# Altium PCB EEM_PWR_MOD_AC.pcbdoc (part 1 of 2)
Units mm, origin at the board's own origin, x right, y up, seen from the top; angles counter-clockwise.
Board outline 177.11 x 100.13 mm, 2 copper layers (Top Layer, Bottom Layer), stack 1.62 mm thick; 73 components, 37 nets, 173 pads, 46 vias.
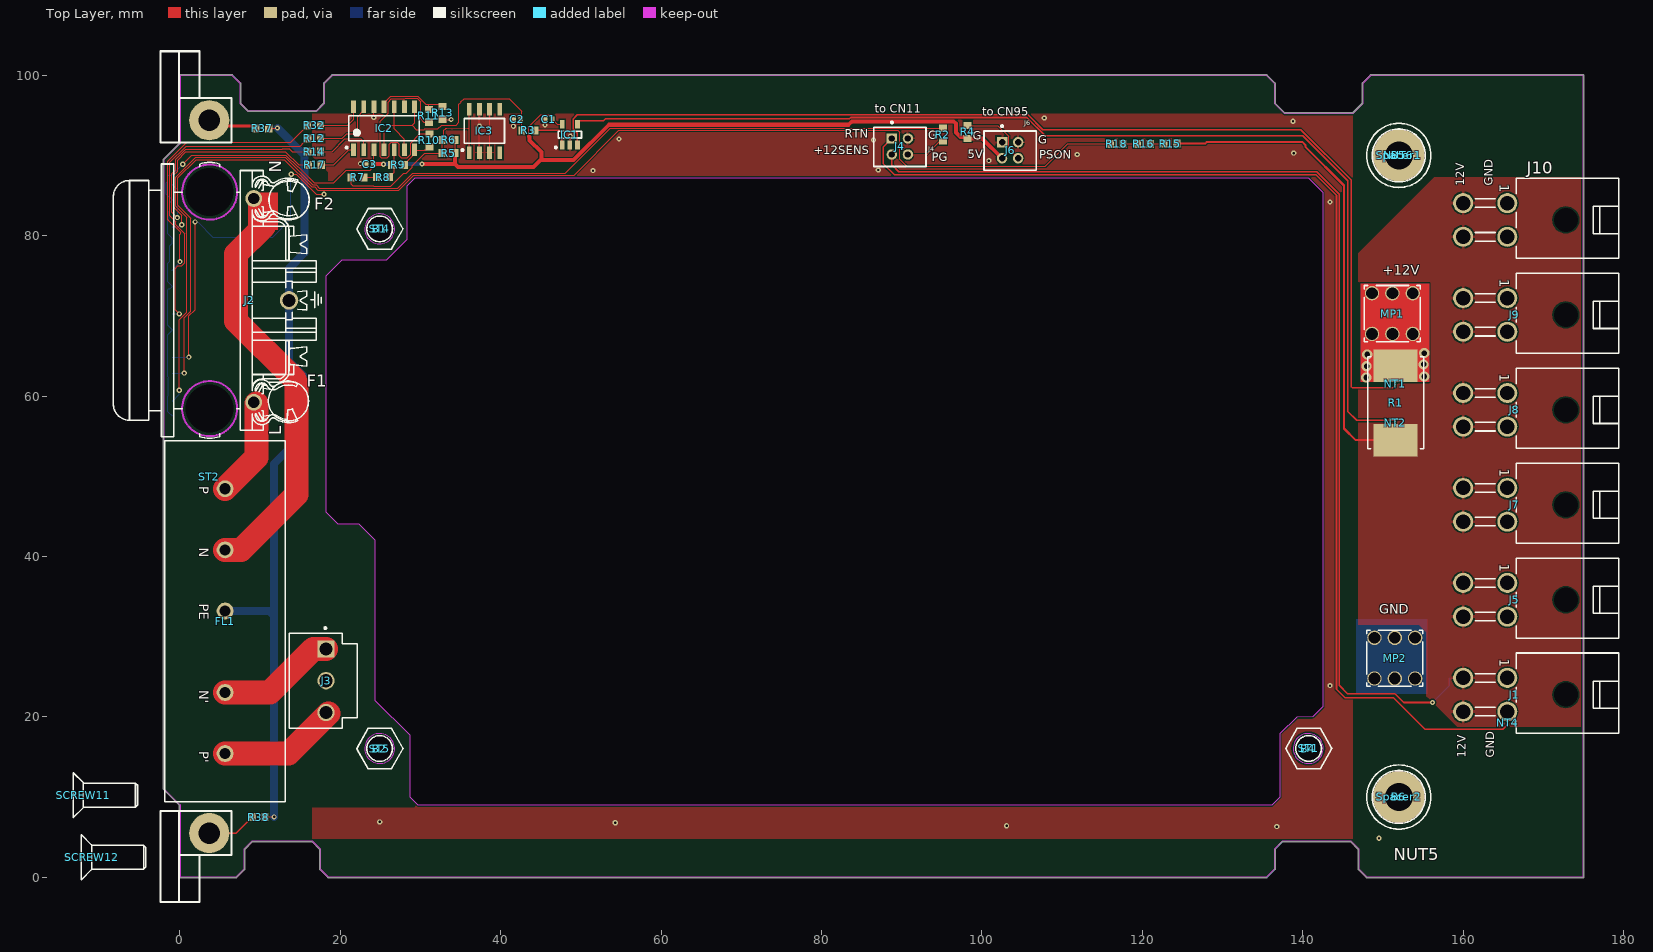
[diagram p0: Top Layer view]
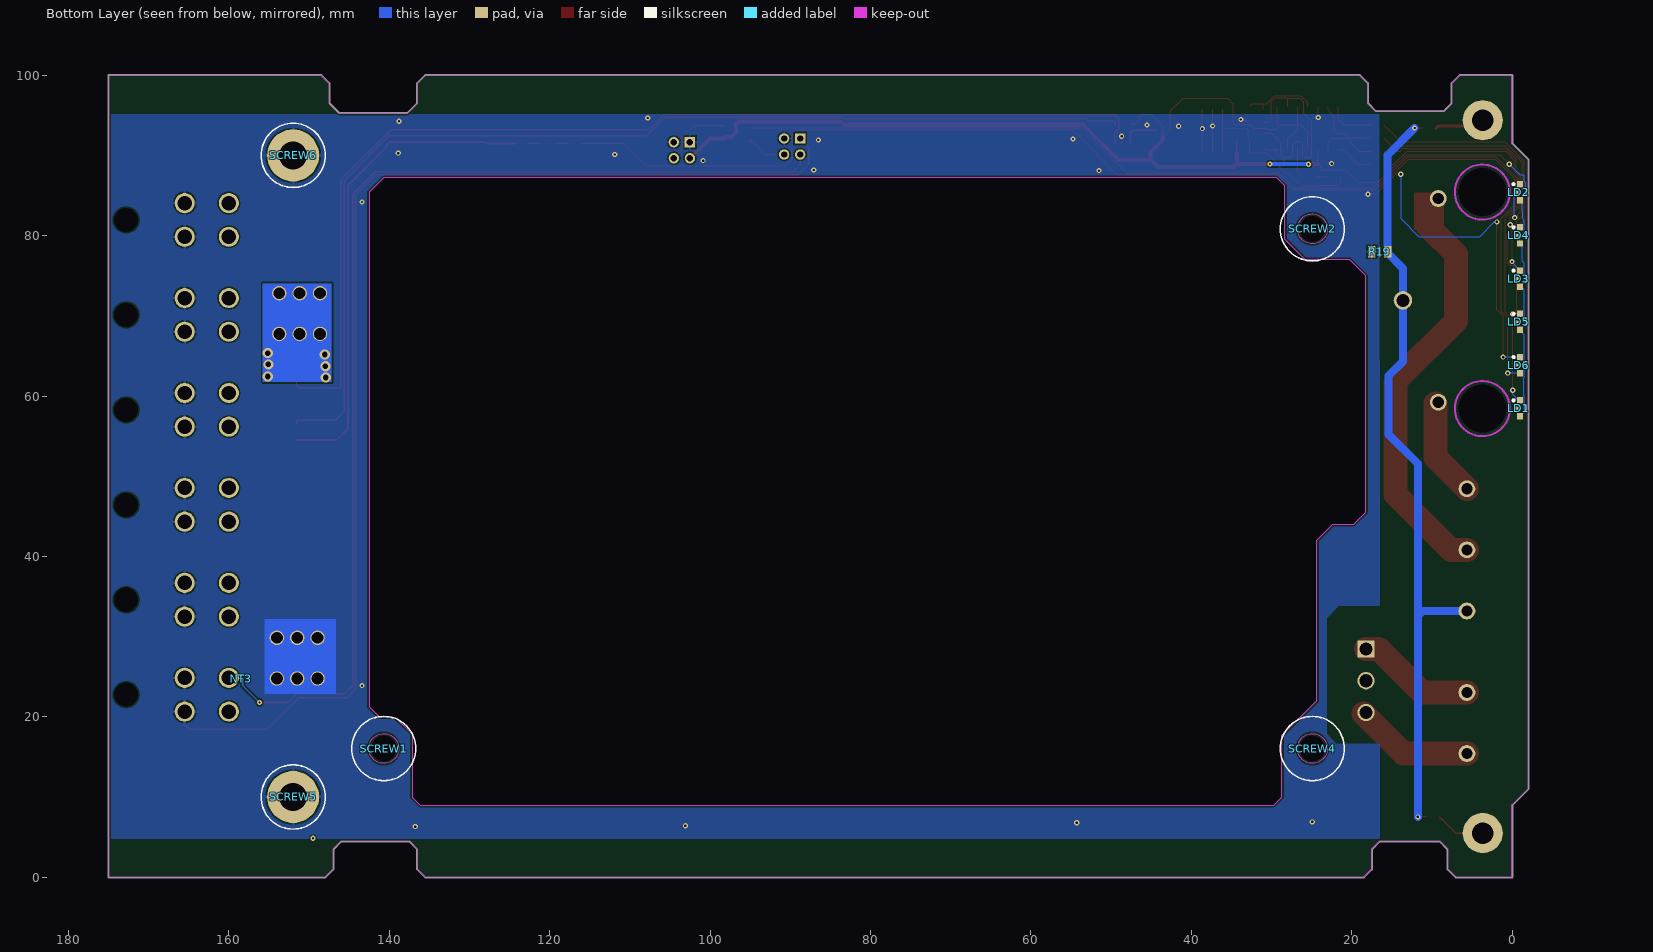
[diagram p1: Bottom Layer view, seen from below]
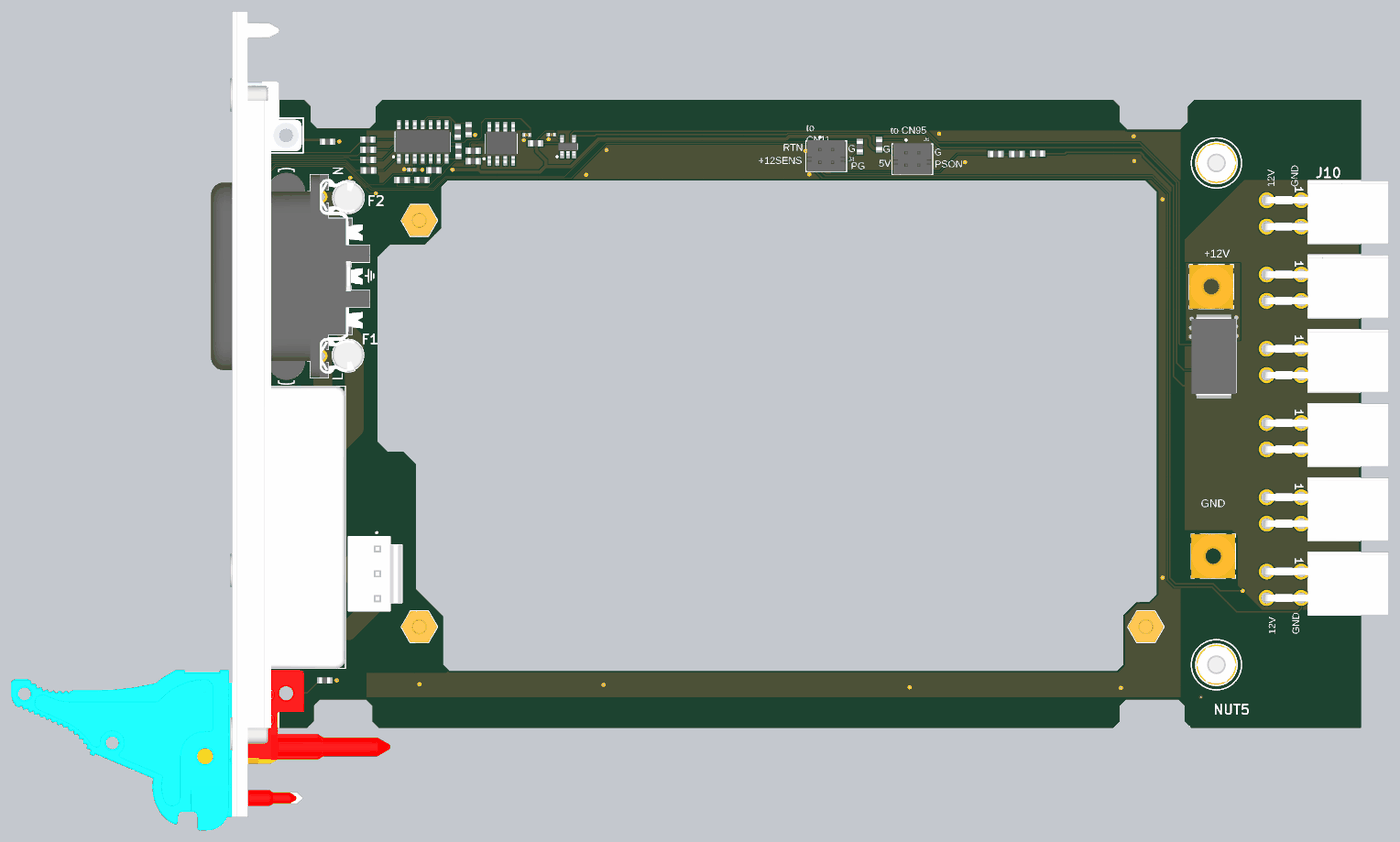
[diagram p2: 3D render of the assembled board from above, using the file's embedded part models]
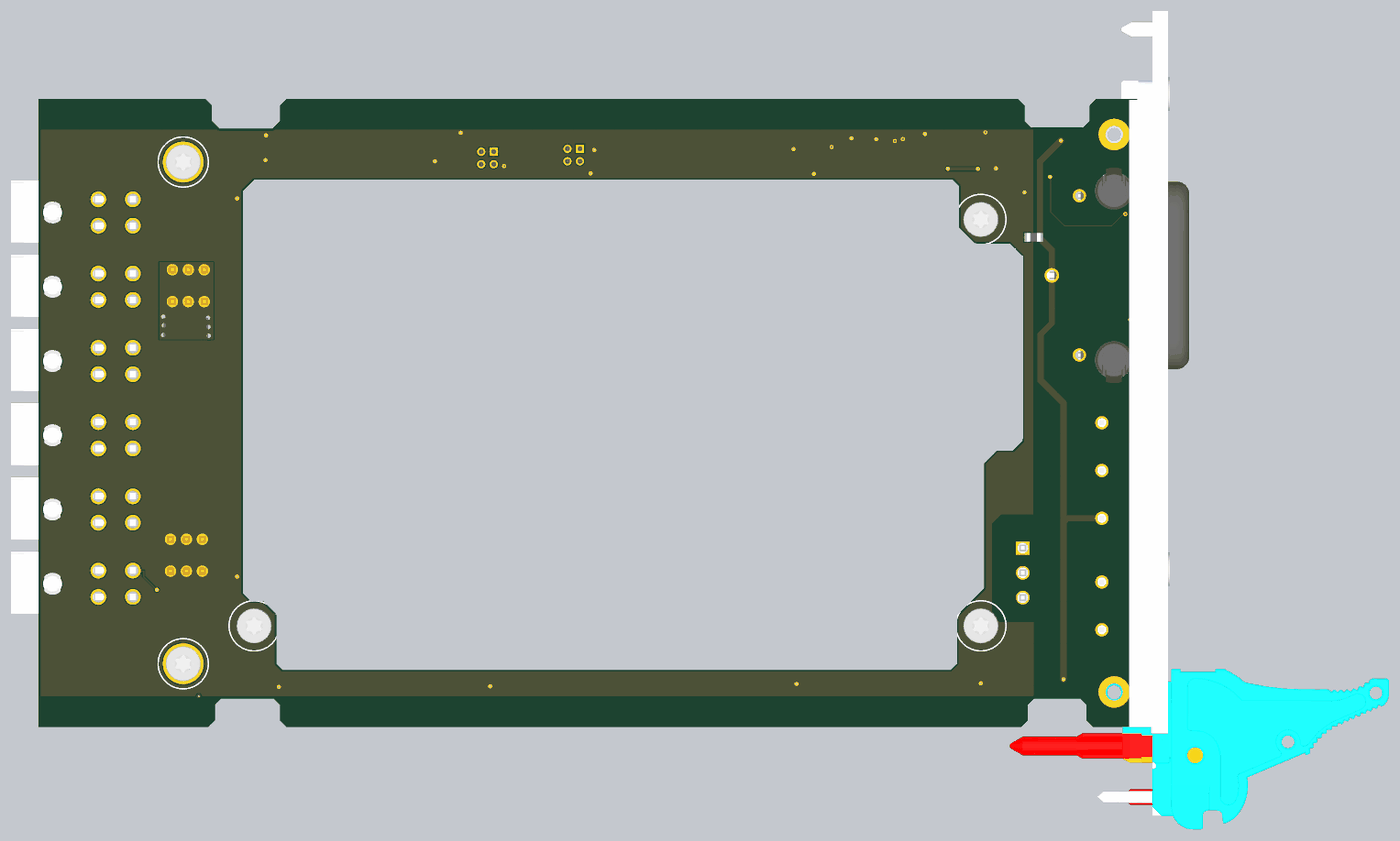
[diagram p3: 3D render of the assembled board from below, using the file's embedded part models]

## Layer stack, top to bottom
Top Solder: solder mask 0.01, Solder Resist, Dk 3.5
Top Layer: signal copper 0.035
Dielectric 6: core 1.55, FR-4, Dk 4.6
Bottom Layer: signal copper 0.035
Bottom Solder: solder mask 0.01, Solder Resist, Dk 3.5

## Board outline
0,-0.064 7,-0.064 ccw(c7,0) 7.045,-0.045 8.045,0.955 ccw(c8,1) 8.064,1 8.064,3.474 9.026,4.436 16.474,4.436 17.436,3.474 17.436,1 ccw(c17.5,1) 17.455,0.955 18.455,-0.045 ccw(c18.5,0) 18.5,-0.064 135.5,-0.064 ccw(c135.5,0) 135.545,-0.045 136.545,0.955 ccw(c136.5,1) 136.564,1 136.564,3.474 137.526,4.436 145.974,4.436 146.936,3.474 146.936,1 ccw(c147,1) 146.955,0.955 147.955,-0.045 ccw(c148,0) 148,-0.064 160,-0.064 ccw(c160,0) 160.039,-0.05 174.999,-0.05 ccw(c175,0) 175.05,0 175.05,100 ccw(c175,100) 174.983,100.048 160.043,100.048 ccw(c160,100) 160,100.064 148.5,100.064 ccw(c148.5,100) 148.455,100.045 147.455,99.045 ccw(c147.5,99) 147.436,99 147.436,96.526 146.247,95.338 137.753,95.338 136.564,96.526 136.564,99 ccw(c136.5,99) 136.545,99.045 135.545,100.045 ccw(c135.5,100) 135.5,100.064 19,100.064 ccw(c19,100) 18.955,100.045 17.955,99.045 ccw(c18,99) 17.936,99 17.936,96.526 16.96,95.55 8.521,95.55 7.55,96.521 7.55,98.961 ccw(c7.5,99) 7.564,99 ccw(c7.5,99) 7.545,99.045 6.545,100.045 ccw(c6.5,100) 6.5,100.064 0,100.064 ccw(c0,100) -0.064,100 -0.064,91.526 -2.045,89.545 ccw(c-2,89.5) -2.064,89.5 -2.064,11 ccw(c-2,11) -2.045,10.955 -0.064,8.974 -0.064,0 ccw(c0,0)
cut-out: 28.366,86.2 29.366,87.2 140.693,87.2 142.5,85.393 142.5,21.25 141.261,20.011 139.268,19.964 137.166,17.916 137.166,10 136.166,9 29.701,9 28.701,10 28.701,17.672 24.366,22.008 24.366,42 22.366,44 19.766,44 18.266,45.5 18.266,75 20.266,77 25.78,77 28.366,79.586

## Design rules (kind name [scope] priority, off if disabled: settings)
BoardOutlineClearance [All] p1: gap=0.25 ignorepadtopadclearanceinfootprint=FALSE
Clearance Clearance_AC [InNetClass('AC')] p1: gap=2.5 ignorepadtopadclearanceinfootprint=FALSE
Clearance Clearance_NT [InComponent('NT*')] p2: gap=0 ignorepadtopadclearanceinfootprint=TRUE
Clearance Clearance_Poly [InPoly] p3: gap=0.18 ignorepadtopadclearanceinfootprint=FALSE
Clearance [All vs not HasFootprint('Net Tie')] p4: gap=0.127 ignorepadtopadclearanceinfootprint=FALSE except(0: Arc-Hole Track-Hole SMDPad-Hole THPad-Hole Via-Hole Fill-Hole Poly-Hole Region-Hole Text-Hole)
ComponentClearance ComponentClearance_pressfit [HasCompParameterValue('PressFit','Yes') vs InComponent('No Component')] p1: gap=5 collisioncheckmode=3 verticalgap=0.254 showdistances=FALSE
ComponentClearance ComponentClearance_NM [InComponentClass('NotMounted')] p2: gap=0 collisioncheckmode=3 verticalgap=0 showdistances=FALSE
ComponentClearance ComponentClearance_Top [not InComponentClass('Overlapping') and InComponentClass('Top Side Components') vs InComponentClass('Top Side Components')] p3: gap=0 collisioncheckmode=3 verticalgap=2540 showdistances=FALSE
ComponentClearance Overlapping [InComponentClass('Overlapping') vs InComponentClass('Overlapping')] p4: gap=0 collisioncheckmode=3 verticalgap=0 showdistances=FALSE
DiffPairsRouting [All] p1: maxlimit=0.2 minlimit=0.2 mostfreqgap=0.2 toplayer_minwidth=0.1 toplayer_maxwidth=0.1 toplayer_prefwidth=0.1 bottomlayer_minwidth=0.1 bottomlayer_maxwidth=0.1 bottomlayer_prefwidth=0.1 maxuncoupledlength=50
FabricationTestPointUsage TestPointUsage [All] p1: valid=0 allowmultiple=FALSE
FabricationTestpoint Testpoint [All] p1: side=3 testpointundercomponent=TRUE minsize=1.016 maxsize=2.54 preferedsize=1.524 minholesize=0 maxholesize=1.016 preferedholesize=0.813 testpointgrid=0.025 allowsidetop=TRUE allowsidebottom=TRUE usegrid=TRUE gridtolerance=0
Height [All] p1: minheight=0 maxheight=25 prefheight=10
HoleSize [All] p1: absolutevalues=TRUE maxlimit=5 minlimit=0.2 maxpercent=80.000 minpercent=20.000
HoleToHoleClearance [All] p1: gap=0.2 allowstackedmicrovias=TRUE
Length "Length CPCIs2a + XS" [InNetClass('CPCIs2a') or InxSignalClass('CPCIs2 XS')] p1: maxlimit=126 minlimit=121
Length "Length CPCIs5a + XS" [InNetClass('CPCIs5a')    or InxSignalClass('CPCIs5 XS')] p2: maxlimit=155.1 minlimit=151
MatchedLengths DiffPair_gbtclkm2c_MatchedLengths [InDifferentialPair ('FMCGBTCLKM2C_C1') Or InDifferentialPair ('FMCGBTCLKM2C_C0')] p1: tolerance=5 checknetsindiffpair=FALSE checkdiffpairvsdiffpair=TRUE checkxsignals=TRUE checkothers=TRUE
MatchedLengths DiffPair_gbtxClockDes_MatchedLengths [InDifferentialPair ('GBTXCLOCKDES_N0') Or InDifferentialPair ('GBTXCLOCKDES_P0') Or InDifferentialPair ('GBTXCLOCKDES_N1') Or InDifferentialPair ('GBTXCLOCKDES_P1')Or InDifferentialPair ('GBTXCLOCKDES_N2') Or InDifferentialPair ('GBTXCLOCKDES_P2')Or InDifferentialPair ('GBTXCLOCKDES_N3') Or InDifferentialPair ('GBTXCLOCKDES_P3') Or InDifferentialPair ('GBTXCLOCKDES_N4') Or InDifferentialPair ('GBTXCLOCKDES_P4')] p2: tolerance=5 checknetsindiffpair=FALSE checkdiffpairvsdiffpair=TRUE checkxsignals=TRUE checkothers=TRUE
MatchedLengths DiffPair_Scout_ScclkMatchedLengths [InDifferentialPair ('GBTXELINKSSCCLK') Or InDifferentialPair ('GBTXELINKSSCOUT')] p3: tolerance=5 checknetsindiffpair=FALSE checkdiffpairvsdiffpair=TRUE checkxsignals=TRUE checkothers=TRUE
MinimumAnnularRing MinimumAnnularRing_Via [IsVia] p1: minimumring=0.12
MinimumAnnularRing [All] p2: minimumring=0.12
MinimumSolderMaskSliver [IsThruPin vs IsThruPin] p1: minsoldermaskwidth=0
NetAntennae [All] p1 off: netantennaetolerance=0
PermittedLayers [All] p1: toplayerpermitted=TRUE bottomlayerpermitted=FALSE
PlaneClearance PlaneClearance_ac [InNetClass('AC')] p1: clearance=2
PlaneClearance [All] p2: clearance=0.25
PlaneConnect PlaneConnect_ft_pcbm [InPadClass('ft_pcbm')] p1: planeconnectstyle=Relief reliefexpansion=0.25 reliefentries=4 reliefconductorwidth=0.2 reliefairgap=0.2
PlaneConnect PlaneConnect_Vias [IsVia or InPadClass('Direct')] p2: planeconnectstyle=Direct reliefexpansion=0.508 reliefentries=4 reliefconductorwidth=0.254 reliefairgap=0.254
PlaneConnect "PlaneConnect_0 > 0.5" [AsMM(HoleDiameter)<0.5] p3: planeconnectstyle=Relief reliefexpansion=0.3 reliefentries=4 reliefconductorwidth=0.2 reliefairgap=0.2
PlaneConnect "PlaneConnect_0.5 > 1" [(AsMM(HoleDiameter)>=0.5) and (AsMM(HoleDiameter)<1)] p4: planeconnectstyle=Relief reliefexpansion=0.3 reliefentries=4 reliefconductorwidth=0.25 reliefairgap=0.2
PlaneConnect "PlaneConnect_1 > 1.5" [(AsMM(HoleDiameter)>=1) and (AsMM(HoleDiameter)<1.5)] p5: planeconnectstyle=Relief reliefexpansion=0.3 reliefentries=4 reliefconductorwidth=0.3 reliefairgap=0.2
PlaneConnect "PlaneConnect_1.5 > 2" [(AsMM(HoleDiameter)>=1.5) and (AsMM(HoleDiameter)<2)] p6: planeconnectstyle=Relief reliefexpansion=0.3 reliefentries=4 reliefconductorwidth=0.4 reliefairgap=0.2
PlaneConnect [All] p7: planeconnectstyle=Relief reliefexpansion=0.3 reliefentries=4 reliefconductorwidth=0.5 reliefairgap=0.2
PolygonConnect PolygonConnect_Vias [IsVia or InPadClass('Direct') or InNetClass('ESD_STRIP')] p1: connectstyle=Direct reliefconductorwidth=0.254 reliefentries=4 polygonreliefangle="90 Angle" airgapwidth=0.254
PolygonConnect "PolygonConnect_0 > 0.5" [AsMM(HoleDiameter)<0.5] p2: connectstyle=Relief reliefconductorwidth=0.2 reliefentries=4 polygonreliefangle="90 Angle" airgapwidth=0.2
PolygonConnect "PolygonConnect_0.5 > 1" [(AsMM(HoleDiameter)>=0.5) and (AsMM(HoleDiameter)<1)] p3: connectstyle=Relief reliefconductorwidth=0.25 reliefentries=4 polygonreliefangle="90 Angle" airgapwidth=0.2
PolygonConnect "PolygonConnect_1 > 1.5" [(AsMM(HoleDiameter)>=1) and (AsMM(HoleDiameter)<1.5)] p4: connectstyle=Relief reliefconductorwidth=0.3 reliefentries=4 polygonreliefangle="90 Angle" airgapwidth=0.2
PolygonConnect "PolygonConnect_1.5 > 2" [(AsMM(HoleDiameter)>=1.5) and (AsMM(HoleDiameter)<2)] p5: connectstyle=Relief reliefconductorwidth=0.4 reliefentries=4 polygonreliefangle="90 Angle" airgapwidth=0.2
PolygonConnect [All] p6: connectstyle=Relief reliefconductorwidth=0.5 reliefentries=4 polygonreliefangle="90 Angle" airgapwidth=0.2
RoomDefinition EEM_PWR_MOD_AC [InComponentClass('EEM_PWR_MOD_AC')] p1 off: confinementstyle=ConfineIn formatcopy=TRUE lockcomponents=FALSE outline 9.201,0.112 17.5,0.112 17.5,3.5 9.201,3.5
RoomDefinition Mechanics [InComponentClass('Mechanics')] p2 off: confinementstyle=ConfineIn formatcopy=TRUE lockcomponents=FALSE outline 137,96 148.128,96 148.128,100 137,100
RoutingVias [All] p1: holewidth=0.3 width=0.65 viastyle="Through Hole" minholewidth=0.2 minwidth=0.45 maxholewidth=1.016 maxwidth=1.27
ShortCircuit ShortCircuit_NT [InComponent('J34') or  InComponent('J31') or InComponent('J30') or InComponent('J29') or InComponent('J33') or InComponent('J26') vs InComponent('NT*')] p1: allowed=TRUE
ShortCircuit [All] p2: allowed=FALSE
SilkToSilkClearance [All] p1: silktosilkclearance=0.05
SilkToSolderMaskClearance [IsPad] p1: minsilkscreentomaskgap=0.08 clearancetoexposedcopper=TRUE
SolderMaskExpansion [All] p1: expansion=0 istentingtop=FALSE
ViasUnderSMD ViasUnderSMD_1 [HasFootprint ('CAPC0603X33N')   or HasFootprint ('RESC1005X40N')  or HasFootprint('CAPC1608X87N')   or HasFootprint('CAPC1005X55N')   or  HasFootprint('Net Tie')] p1: allowed=TRUE
ViasUnderSMD [not InComponentClass('Overlapping')] p2: allowed=FALSE
Width Width_PWR [InNetClass('Power')] p1: maxlimit=3 minlimit=0.254 preferedwidth=0.4 minimp=50.000000 maximp=50.000000 favimp=50.000000
Width [All] p2: maxlimit=3 minlimit=0.127 preferedwidth=0.127
16 further rules are at their usual default settings.

## Classes and differential pairs
net class AC: NetFL1_N NetFL1_N' NetFL1_P NetFL1_P'
component class Mechanics: B1 B2 B4 B5 B6 NUT5 NUT6 R37 R38 SCREW1 SCREW2 SCREW4 SCREW5 SCREW6 SCREW11 SCREW12 Spacer1 Spacer2 ST1 ST2 ST4 ST5
net class Power: P12V0 P12V0_SMPS
component class EEM_PWR_MOD_AC: C1 C2 C3 F1 F2 FL1 IC1 IC2 IC3 J1 J2 J3 J4 J5 J6 J7 J8 J9 J10 JP1 LD1 LD2 LD3 LD4 LD5 LD6 MP1 MP2 NT1 NT2 NT3 NT4 R1 R2 R3 R4 R5 R6 R7 R8 R9 R10 R11 R12 R13 R14 R15 R16 R17 R18 R19 R32

## Components (designator, comment, footprint, x,y, rotation, side; value= is the part's Value field where it differs from the comment)
B1 "Non Plated Hole" MTG320 24.909,80.843 r0 top
B2 "Non Plated Hole" MTG320 24.901,16.05 r0 top
B4 "Non Plated Hole" MTG320 140.701,16.05 r0 top
B5 "Plated Hole" MTG350_650 152,90.01 r0 top
B6 "Plated Hole" MTG350_650 152,10.005 r0 top
C1 "100nF" CAPC1005X55N 45.974,94.539 r0 top
C2 "100nF" CAPC1005X55N 42.044,94.501 r0 top
C3 "100nF" CAPC1005X55N 23.673,88.936 r0 top
F1 "10A-250VAC" FUSE_5X20_GLASS_v 13.526,59.385 r0 top
F2 "10A-250VAC" FUSE_5X20_GLASS_v 13.6,84.47 r0 top
FL1 "1A/250VAC" "FIL_SCHAFFNER_FN 406" 5.625,31.928 r270 top
IC1 "INA194AIDBVT" SOT95P280X145-5N 48.616,92.608 r90 top
IC2 "LM339AD" SOIC127P600X175-14N 25.451,93.396 r90 top
IC3 "TL431CD" SOIC127P600X175-8N 37.973,93.066 r90 top
J1 "Mini-Fit Jr.™" MOLEX_39-30-0040 162.772,22.758 r270 top
J2 "IEC" SCHURTER_GSF1.2202.31 3.7,71.936 r90 top locked
J3 "B3P-VH(LF)(SN) or  AMP-TE 1-1123723-3" JST-B3P-VH(LF)(SN)-3_V 16.967,24.503 r270 top
J4 "Header 4" HIROSE_DF11-4DP-2DSA 89.78,91.126 r0 top
J5 "Mini-Fit Jr.™" MOLEX_39-30-0040 162.772,34.6 r270 top
J6 "Header 4" HIROSE_DF11-4DP-2DSA 103.518,90.659 r0 top
J7 "Mini-Fit Jr.™" MOLEX_39-30-0040 162.772,46.441 r270 top
J8 "Mini-Fit Jr.™" MOLEX_39-30-0040 162.772,58.283 r270 top
J9 "Mini-Fit Jr.™" MOLEX_39-30-0040 162.772,70.124 r270 top
J10 "Mini-Fit Jr.™" MOLEX_39-30-0040 162.772,81.966 r270 top
LD1 "Red" LED_AVAGO_HSMC-C120 -0.991,58.471 r270 bottom
LD2 "Green" LED_AVAGO_HSME-C120 -0.991,85.42 r270 bottom
LD3 "Green" LED_AVAGO_HSME-C120 -0.991,74.64 r270 bottom
LD4 "Green" LED_AVAGO_HSME-C120 -0.991,80.03 r270 bottom
LD5 "Green" LED_AVAGO_HSME-C120 -0.991,69.251 r270 bottom
LD6 "Green" LED_AVAGO_HSME-C120 -0.991,63.861 r270 bottom
MP1 "M3x5mm" "7461057_for chemical surfaces" 151.192,70.292 r0 top
MP2 "M3x5mm" "7461057_for chemical surfaces" 151.494,27.317 r0 top
NT1 "Net Tie" "Net Tie" 151.562,61.417 r90 top net-tie
NT2 "Net Tie" "Net Tie" 151.562,56.82 r270 top net-tie
NT3 "Net Tie" "Net Tie" 158.369,24.765 r0 bottom net-tie
NT4 "Net Tie" "Net Tie" 165.557,19.126 r90 top net-tie
NUT5 "M3" BOSSARD_BN628-1241443_v 152,10 r0 top
NUT6 "M3" BOSSARD_BN628-1241443_v 152,90.01 r0 top
R1 "0R001" RESM11670X254N 151.6,59.157 r270 top
R2 "1k" RESC1608X55N 95.148,92.608 r90 top
R3 "10k" RESC1608X55N 43.434,93.142 r0 top
R4 "1k" RESC1608X55N 98.222,92.939 r270 top
R5 "1k" RESC1608X55N 33.503,90.305 r0 top
R6 "1k" RESC1608X55N 33.503,91.943 r0 top
R7 "10k" RESC1608X55N 22.149,87.274 r0 top
R8 "10k" RESC1608X55N 25.336,87.3 r0 top
R9 "10k" RESC1608X55N 27.205,88.824 r0 top
R10 "10k" RESC1608X55N 31.115,91.884 r90 top
R11 "10k" RESC1608X55N 31.039,94.945 r90 top
R12 "1k" RESC1608X55N 16.739,92.126 r180 top
R13 "10k" RESC1608X55N 32.766,95.326 r270 top
R14 "1k" RESC1608X55N 16.739,90.5 r180 top
R15 "1k" RESC1608X55N 123.495,91.491 r0 top
R16 "1k" RESC1608X55N 120.193,91.44 r0 top
R17 "1k" RESC1608X55N 16.815,88.824 r180 top
R18 "1k" RESC1608X55N 116.802,91.44 r0 top
R19 "Undefined" RESC2012X60N 16.5,78 r0 bottom
R32 "1k" RESC1608X55N 16.713,93.751 r180 top
R37 "0" RESC1608X55N 10.268,93.379 r180 top
R38 "0" RESC1608X55N 9.805,7.498 r180 top
SCREW1 "M3x6" BOSSARD_BN5687-3061605_v 140.701,16.05 r180 bottom
SCREW2 "M3x6" BOSSARD_BN5687-3061605_v 24.901,80.85 r180 bottom
SCREW4 "M3x6" BOSSARD_BN5687-3061605_v 24.901,16.05 r180 bottom
SCREW5 "M3x12" BOSSARD_BN5687-3061609_v 152,10.005 r180 bottom
SCREW6 "M3x12" BOSSARD_BN5687-3061609_v 152,90.015 r180 bottom
SCREW11 "M3x8" OSSARD_M3X8/BN3327_h -12.04,10.236 r180 top
SCREW12 "M3x8" OSSARD_M3X8/BN3327_h -11.024,2.489 r180 top
Spacer1 "4mm" DREMEC_DR316/3.2X4 152,90.01 r90 top
Spacer2 "4mm" DREMEC_DR316/3.2X4 152,10.005 r90 top
ST1 "M3x28" ETTINGER-M3X28_05.13.281_REV 140.748,16.059 r0 top
ST2 "SCHROFF_PANEL_3U_8HP" SCHROFF_PANEL_3HP_8U_CPCIS_AC_PSU 3.652,5.501 r0 top locked
ST4 "M3x28" ETTINGER-M3X28_05.13.281_REV 24.901,80.85 r0 top
ST5 "M3x28" ETTINGER-M3X28_05.13.281_REV 24.901,16.05 r0 top

## Footprints (in the part's own frame and the unit in brackets; to place one, negate y for a bottom-side part, rotate by r counter-clockwise, add the part's x,y. Pads: shape width x height; smd on the part's side, far side on the other; paste and mask are expansions set on the pad)
"7461057_for chemical surfaces" [mm] "WP-BUTR Bushes with two Rows Pin-Plate, M3, blind thr 6mm"
  round 1.8 hole 1.475: 1(-2.54,-2.54) 1(-2.54,2.54) 1(0,-2.54) 1(0,2.54) 1(2.54,-2.54) 1(2.54,2.54)
  silkscreen extent -3.5,-3.5 3.5,3.5, body extent -3.5,-3.5 3.5,3.5, height 6
BOSSARD_BN628-1241443_v [mm] "M3 Hexagon Nut ~0,8d, ISO 4032, DIN 934, Stainless Steel A2"
  silkscreen extent -4,-4 4,4, body extent -3.18,-2.75 3.18,2.75, height 7.9
BOSSARD_BN5687-3061605_v [mm] "M3 L=6mm Hexalobular Socket Pan Head Screw, Fully Threaded - Stainless Steel A2"
  silkscreen extent -4,-4 4,4, body extent -2.8,-2.8 2.8,2.8, height 2.4
BOSSARD_BN5687-3061609_v [mm] "M3 L=12mm Hexalobular Socket Pan Head Screw, Fully Threaded - Stainless Steel A2"
  silkscreen extent -4,-4 4,4, body extent -2.8,-2.8 2.8,2.8, height 2.4
CAPC1005X55N [mm] "Capacitor, Non-Polarized, Chip; 1.00mm L X 0.50mm W X 0.70mm H, IPC Medium Density"
  rect 0.62x0.62 smd: 1(-0.45,0) 2(0.45,0)
  body extent -0.52,-0.27 0.53,0.28, height 0.55
DREMEC_DR316/3.2X4 [mm] "Metric Female Unthreaded Round Brass Spacer/Pillar, Length 4mm, External Dia. 6mm, Internal Dia. 3.2mm"
  silkscreen extent -3.3,-3.3 3.3,3.3, body extent -3,-3 3,3, height 4
ETTINGER-M3X28_05.13.281_REV [mm] "M3x28 standoff"
  silkscreen extent -2.87,-2.54 2.91,2.54, body extent -3.61,-3.75 3.61,3.75, height 34.01
"FIL_SCHAFFNER_FN 406" [mm] "0.5 to 8.4A 250VAC Single Phase Ultra Compact EMC Filter (Body 45 x 15 x 28mm)"
  round 2.1 hole 1.4: N(-8.89,0) N'(8.89,0) P(-16.51,0) P'(16.51,0) PE(-1.27,0)
  silkscreen extent -22.5,-7.5 22.5,7.5, body extent -22.5,-7.55 22.5,7.54, height 29.5
FUSE_5X20_GLASS_v [mm] "Generic 5x20mm Cylindrical Glass Fuse (Vertical Mount)"
  silkscreen extent -2.5,-2.5 2.5,2.5, body extent -2.5,-2.5 2.5,2.5, height 20
HIROSE_DF11-4DP-2DSA [mm]
  rect 1.3x1.3 hole 0.8 paste-1000 mask+0: 1(-1,1)
  round 1.3 hole 0.8 paste-1000 mask+0: 2(-1,-1) 3(1,1) 4(1,-1)
  silkscreen extent -3.25,-2.5 3.25,3.12, body extent -3,-2.5 3,2.5, height 6.61
JST-B3P-VH(LF)(SN)-3_V [mm] "Connector, 3-Leads, Body 8.5x11.82mm, Pitch 3.96mm"
  rect 2.15x2.15 hole 1.65: 1(-3.96,1.25)
  round 2.15 hole 1.65: 2(0,1.25) 3(3.96,1.25)
  silkscreen extent -6.68,-3.35 5.91,5.15, body extent -5.91,-3.35 5.91,5.15, height 10.9
LED_AVAGO_HSMC-C120 [mm] "Red Chip LED, 2-Leads, Body 1.7x1.1mm, Side Emitting Package"
  rect 0.8x0.7 smd: 1(-1,0) 2(1,0)
  rect 0.4x0.4 smd: 3(0,-0.35)
  silkscreen extent -1.12,-0.92 0.42,0.8, body extent -0.85,-0.3 0.85,0.8, height 0.7
LED_AVAGO_HSME-C120 [mm] "Green Chip LED, 2-Leads, Body 1.7x1.1mm, Side Emitting Package"
  rect 0.8x0.7 smd: 1(-1,0) 2(1,0)
  rect 0.4x0.4 smd: 3(0,-0.35)
  silkscreen extent -1.12,-0.92 0.42,0.8, body extent -0.85,-0.3 0.85,0.8, height 0.7
MOLEX_39-30-0040 [mm] "4.20mm (.165\") Pitch Mini-Fit Jr. Header, Dual Row, Right Angle with Snap-in Plastic Peg PCB Lock, 4 Circuits"
  round 2.5 hole 1.8: 1(-2.1,2.75) 2(2.1,2.75) 3(-2.1,-2.75) 4(2.1,-2.75)
  round 1 hole 3 unplated mask+1: 5(0,10.05)
  silkscreen extent -5.2,-1.24 4.8,16.65, body extent -5.2,-3.28 4.8,16.65, height 11.4
MTG320 [mm] "Non Plated Through Hole: Hole Dia.=3.2mm"
  round 0.5 hole 3.2 unplated mask+1.35: 1(0,0)
MTG350_650 [mm] "Plated Through Hole: Hole Dia.=3.5mm Pad Dia.=6.5mm"
  round 6.5 hole 3.5: 1(0,0)
"Net Tie" [mil] "SMD Net Tie"
  rect 5x5 smd paste-2.5 mask-2.5: 1(0,0) 2(10,0)
  Top Layer lines w5: 0,0 10,0
OSSARD_M3X8/BN3327_h [mm] "M3 L=6mm countersunk; Pozidriv Head Screw, Fully Threaded - Stainless Steel A2"
  silkscreen extent -6.76,-2.8 1.27,2.8, body extent -6.73,-2.62 1.27,2.63, height 29.32
RESC1608X55N [mm] "Chip Resistor, EIA 0603, Metric 1608, Body 1.6x0.8mm, IPC Medium Density"
  rect 0.9x1 smd: 1(-0.8,0) 2(0.8,0)
  body extent -0.87,-0.47 0.88,0.48, height 0.55
RESC2012X60N [mm] "Chip Resistor, EIA 0805, Metric 2012, Body 2.0x1.2mm, IPC Medium Density"
  rect 0.95x1.4 smd: 1(-1,0) 2(1,0)
  silkscreen extent 0,-0.55 0,0.55, body extent -1.1,-0.67 1.1,0.68, height 0.6
RESM11670X254N [mm] "Resistor, Molded Body; 11.56mm L X 6.98mm W X 2.537mm H, IPC Medium Density"
  rect 4.05x5.5 smd: 1(-4.65,0) 2(4.65,0)
  silkscreen extent -5.75,-3.5 5.75,3.5, body extent -6.19,-3.55 6.19,3.55, height 2.54
SCHROFF_PANEL_3HP_8U_CPCIS_AC_PSU [mm] "Schroff PCB 8HP 3U Eurocard Panel Kit"
  round 5 hole 2.7: 0(0,0) 1(0,88.9)
  silkscreen extent -6.1,-8.6 2.75,97.5, body extent -43.8,-21.9 16.65,108.65, height 34
SCHURTER_GSF1.2202.31 [mm] "IEC Appliance Inlet C14 with 2 Pole Fuseholder"
  round 2.1 hole 1.4: 1(-12.7,-5.5) 3(12.7,-5.5)
  round 2.3 hole 1.6: 2(0,-9.9)
  round 1 hole 6 unplated mask+2.5: 4(-13.5,0) 5(13.5,0)
  silkscreen extent -17.2,-13.93 17.2,12, body extent -17.18,-13.3 17.18,12, height 24.45
SOIC127P600X175-8N [mm] "SOIC 8, Pitch 1.27mm - Body 4x5mm, IPC Medium Density"
  rect 1.55x0.6 smd: 1(-2.7,1.905) 2(-2.7,0.635) 3(-2.7,-0.635) 4(-2.7,-1.905) 5(2.7,-1.905) 6(2.7,-0.635) 7(2.7,0.635) 8(2.7,1.905)
  silkscreen extent -2.52,-2.5 1.55,2.88, body extent -3.1,-2.5 3.1,2.5, height 1.75
SOIC127P600X175-14N [mm] "SOIC 14, Pitch 1.27mm - Body 4x8.75mm, IPC Medium Density"
  rect 1.55x0.6 smd: 1(-2.7,3.81) 2(-2.7,2.54) 3(-2.7,1.27) 4(-2.7,0) 5(-2.7,-1.27) 6(-2.7,-2.54) 7(-2.7,-3.81) 8(2.7,-3.81) 9(2.7,-2.54) 10(2.7,-1.27) 11(2.7,0) 12(2.7,1.27) 13(2.7,2.54) 14(2.7,3.81)
  silkscreen extent -2.52,-4.4 1.55,4.78, body extent -3.1,-4.37 3.1,4.38, height 1.75
SOT95P280X145-5N [mm] "SOT, 0.95mm pitch; 5 pin, 1.60mm W X 2.90mm L X 1.45mm H body, IPC Medium Density"
  rect 1.1x0.6 smd: 1(-1.3,0.95) 2(-1.3,0) 3(-1.3,-0.95) 4(1.3,-0.95) 5(1.3,0.95)
  silkscreen extent -1.72,-1.45 0.43,1.87, body extent -1.4,-1.5 1.4,1.5, height 1.45

## Part data
B1 B2 B4: library part NON-PLATED_HOLE3.2, "Single Terminal Socket", Author="CERN DEM JLC", Component Type="Standard (No BOM)", ComponentHeight=0mm, CreateDate=26/05/2008, Family="Non Plated Hole", HelpURL=Undefined, LatestRevisionDate=26/05/2008, Mounted=No, PackageDescription="Non Plated Through Hole: Hole Dia.=3.2mm", Part Description="Non Plated Through Hole: Hole Dia.=3.2mm", Part Number=NON-PLATED_HOLE3.2, Pin Count=1, Sense=No, SMD=No, Socket=No, Status=None
B5 B6: library part PLATED_HOLE3.5_PAD6.5, "Single Terminal Socket", Author="CERN DEM JLC", Component Type="Standard (No BOM)", ComponentHeight=0mm, CreateDate=20.11.2008, Family="Plated Hole", HelpURL=Undefined, LatestRevisionDate=23.11.2011, Mounted=No, PackageDescription="Plated Through Hole: Hole Dia.=3.5mm Pad Dia.=6.5mm", Part Description="Plated Through Hole: Hole Dia.=3.5mm Pad Dia.=6.5mm", Part Number=PLATED_HOLE3.5_PAD6.5, Pin Count=1, Sense=No, SMD=No, Socket=No, Status=None
C1 C2 C3: library part CC0402_100NF_25V_10%_X7R_YUDEN_TMK105B7104KVHF, "Non-polarised capacitor", Case=0402, Manufacturer="TAIYO YUDEN", Manufacturer Part Number=TMK105B7104KVHF, Tolerance=±10%, Voltage=25V, Author="CERN DEM JLC", Component Type=Standard, ComponentHeight=0.55mm, CreateDate=10/05/2017, HelpURL=\\cern.ch\dfs\Applications\Altium\Datasheets\CC0402_TAIYO-YUDEN_TMK105B7104KVHF.pdf, LatestRevisionDate=10/05/2017, Mounted=Yes, Part Description="SMD Multilayer Chip Ceramic Capacitor (High Dielectric Type) for Automotive / Industrial Applications", Part Number=CC0402_100NF_25V_10%_X7R_YUDEN_TMK105B7104KVHF, Pin Count=2, Sense=No, SMD=Yes, Socket=No, Status="Not Recommended", TC=X7R
F1 F2: library part FUSE_SCHURTER_0034.3127_v, "Fuse", Manufacturer=SCHURTER, Manufacturer Part Number=0034.3127, Author="CERN DEM JLC", Component Type=Standard, ComponentHeight=20.5mm, CreateDate=28.01.2013, Family=Fuse, HelpURL=\\cern.ch\dfs\Applications\Altium\Datasheets\FUSE_SCHURTER_FST5X20.pdf, LatestRevisionDate=28.01.2013, Mounted=Yes, PackageDescription="5x20mm Cylindrical Fuse, SCHURTER FST5X20 Series", Part Description="Cylindrical 5x20 mm, Time-Lag T Miniature Fuse, FST Series", Part Number=FUSE_SCHURTER_0034.3127_v, Pin Count=0, PressFit=No, Sense=No, SMD=No, Socket=Yes
FL1: library part "FIL_SCHAFFNER_FN 406-1-02", "0.6 to 8.4A 230VAC Single Phase Ultra Compact EMC Filter", Case="L45 W15 H28", Manufacturer=SCHAFFNER, Manufacturer Part Number=FN406-3-02, Part Number=FIL_SCHAFFNER_FN406-3-02, Author="CERN DEM JLC", Component Type=Standard, ComponentHeight=28mm, CreateDate=24.05.2017, HelpURL="\\cern.ch\dfs\Applications\Altium\Datasheets\FIL_SCHAFFNER_FN 406-1-02.pdf", LatestRevisionDate=24.05.2017, Mounted=Yes, Part Description="Single Phase Ultra Compact EMC Filter", Pin Count=5, Sense=No, SMD=No, Socket=No
IC1: "Current Shunt Monitor -16V to +80V Common-Mode Range", Case=SOT23-5, Manufacturer="TEXAS INSTRUMENTS", Author="CERN DEM JLC", Bonding=No, Component Type=Standard, ComponentHeight=1.45mm, CreateDate=10.05.2010, Device=INA194AIDBVT, HelpURL=\\cern.ch\dfs\Applications\Altium\Datasheets\INA194AIDBVT.pdf, LatestRevisionDate=10.05.2010, Manufacturer Part Number=INA194AIDBVT, Mounted=Yes, PackageDescription="SOT, 0.95mm pitch; 5 pin, 1.60mm W X 2.90mm L X 1.45mm H body, IPC Medium Density", Part Description="Current Shunt Monitor -16V to +80V Common-Mode Range", Part Number=INA194AIDBVT, Pin Count=5, PressFit=No, Sense=No, SMD=Yes, Socket=No
IC2: "Quad Operational Amplifier", Case=SOIC14, Manufacturer="TEXAS INSTRUMENTS", Author="CERN DEM JLC", Bonding=No, Component Type=Standard, ComponentHeight=1.75mm, CreateDate=09.03.2011, Device=LM339AD, HelpURL=\\cern.ch\dfs\Applications\Altium\Datasheets\LM339AD.pdf, LatestRevisionDate=09.03.2011, Manufacturer Part Number=LM339AD, Mounted=Yes, PackageDescription="SOIC 14, Pitch 1.27mm - Body 4x8.75mm, IPC Medium Density", Part Description="Quad Differential Comparator", Part Number=LM339AD, Pin Count=14, PressFit=No, Sense=No, SMD=Yes, Socket=No
IC3: "Precision Programmable Reference", Case=SOIC8, Manufacturer="TEXAS INSTRUMENTS", Author="CERN DEM JLC", Bonding=No, Component Type=Standard, ComponentHeight=1.75mm, CreateDate=18.01.2011, Device=TL431CD, HelpURL=\\cern.ch\dfs\Applications\Altium\Datasheets\TL431CD.pdf, LatestRevisionDate=28.02.2011, Manufacturer Part Number=TL431CD, Mounted=Yes, PackageDescription="SOIC 8, Pitch 1.27mm, Body 4x5mm, IPC Medium Density", Part Description="Vref (2.5V) To 36V 2% Precision Programmable Reference", Part Number=TL431CD, Pin Count=8, PressFit=No, Sense=No, SMD=Yes, Socket=No
J1 J5 J7 J8 J9 J10: library part MOLEX_39-30-0040, "Connector 4 Male", Manufacturer=MOLEX, Manufacturer Part Number=39-30-0040, Author="CERN DEM JLC", Component Type=Standard, ComponentHeight=11.4mm, CreateDate=02/10/2018, Family="Mini-Fit Jr.™", HelpURL=\\cern.ch\dfs\Applications\Altium\Datasheets\MOLEX_39-30-0040.pdf, LatestRevisionDate=02/10/2018, Mounted=Yes, Part Description="4.20mm (.165\") Pitch Mini-Fit Jr. Header, Dual Row, Right Angle with Snap-in Plastic Peg PCB Lock, 4 Circuits", Part Number=MOLEX_39-30-0040, Pin Count=4, PressFit=No, Sense=No, SMD=No, Socket=No, Status=None
J2: library part SCHURTER_GSF1.2202.31, "Connector 3 Male 2P+ 2 Fuse Holder", Manufacturer=SCHURTER, Manufacturer Part Number=GSF1.2201.31, Part Number=SCHURTER_GSF1.2201.31, Author="CERN DEM JMW", Component Type=Standard, ComponentHeight=24.45mm, CreateDate=20.09.2012, Family=IEC, HelpURL=\\cern.ch\dfs\Applications\Altium\Datasheets\SCHURTER_GSF1.2202.31.pdf, LatestRevisionDate=20.09.2012, Mounted=Yes, Part Description="10A 250Vac Sandwich Panel Mount (1.5mm) Inlet IEC Connector With 2 Fuseholder 5x20mm And Snap-in PCB Mount", Pin Count=3, PressFit=No, Sense=No, SMD=No, Socket=No, Status=None
J3: library part CMP-1755-00003-1, "Male Header, Pitch 3.96 mm, 1 x 3 Position, Height 10.9 mm, Tail Length 3.7 mm, -25 to 85 degC, RoHS, Bulk", ComponentLink1Description="Manufacturer URL", ComponentLink1URL=http://www.jst.com/home2.html, ComponentLink2Description=Datasheet, ComponentLink2URL=http://www.jst-mfg.com/product/pdf/eng/eVH.pdf, DatasheetVersion=May-16, PackageDescription="Male Header, Pitch 3.96 mm, 1 x 3 Position, Height 10.9 mm, Tail Length 3.7 mm", PackageReference=B3P-VH(LF)(SN)
J4 J6: "Connector 4 Male", Manufacturer="HIROSE (HRS)", Manufacturer Part Number=DF11-4DP-2DSA, Part Number=HIROSE_DF11-4DP-2DSA, Author=GK, Component Type=Standard, ComponentHeight=3.6mm, CreateDate=22.10.2014, Family="Header 4", HelpURL=\\cern.ch\dfs\Applications\Altium\Datasheets\HIROSE_DF13-4P-1.25H(50).pdf, LatestRevisionDate=22.10.2014, Mounted=Yes, Part Description="Pitch 2mm, Dual Row, 4 Contacts,  vertical Header, DF11 Series", Pin Count=4, PressFit=No, Sense=No, SMD=Yes, Socket=No, Status=None
LD1: library part LED_AVAGO_HSMC-C120, "LED Red 1C 2A", Manufacturer="AVAGO TECHNOLOGIES", Manufacturer Part Number=HSMC-C120, Author="CERN DEM JMW", Bonding=No, Color=Red, Component Type=Standard, ComponentHeight=0.7mm, ComponentLink1Description="Design Guide", ComponentLink1URL=\\cern.ch\dfs\Applications\Altium\Datasheets\LED_AVAGO_HSMC-C120_DESIGN-GUIDE.pdf, CreateDate=22.07.2009, HelpURL=\\cern.ch\dfs\Applications\Altium\Datasheets\LED_AVAGO_HSMC-C120.pdf, LatestRevisionDate=20.06.2012, Mounted=Yes, PackageDescription="Red Chip LED, 2-Leads, Body 1.7x1.1mm, Side Emitting Package", Part Description="High Performance Right Angle Chip Red LED", Part Number=LED_AVAGO_HSMC-C120, Pin Count=2, PressFit=No, Sense=No, SMD=Yes, Socket=No
LD2 LD3 LD4 LD5 LD6: library part LED_AVAGO_HSME-C120, "LED Green 1C 2A", Manufacturer="AVAGO TECHNOLOGIES", Manufacturer Part Number=HSME-C120, Author="CERN DEM JMW", Bonding=No, Color=Green, Component Type=Standard, ComponentHeight=0.7mm, ComponentLink1Description="Design Guide", ComponentLink1URL=\\cern.ch\dfs\Applications\Altium\Datasheets\LED_AVAGO_HSME-C110_DESIGN-GUIDE.pdf, CreateDate=22.07.2009, HelpURL=\\cern.ch\dfs\Applications\Altium\Datasheets\LED_AVAGO_HSME-C120.pdf, LatestRevisionDate=20.06.2012, Mounted=Yes, PackageDescription="Green Chip LED, 2-Leads, Body 1.7x1.1mm, Side Emitting Package", Part Description="High Performance Right Angle Chip Green LED", Part Number=LED_AVAGO_HSME-C120, Pin Count=2, PressFit=No, Sense=No, SMD=Yes, Socket=No
MP1 MP2: library part 7461057, "WP-BUTR Press-Fit with Internal thread, two rows, 7x7mm, 6 pins, M3x5mm, 100A", Operating Temperature="-55 to +150degC", Rated Current=100A, ComponentLink1Description=Manufacturer, ComponentLink1URL=http://www.we-online.de, ComponentLink2Description=Datasheet, ComponentLink2URL=https://katalog.we-online.com/em/datasheet/7461057.pdf, Height=6mm, Material=Brass, Mounting Technology=Press-Fit, Packaging=Bulk, Part Number=7461057, Pin Number=6, Published Date="September 2019", Publisher="Wurth Elektronik", Size=7x7mm, Surface=Tin, Thread=M3, Thread Length=5mm
NUT5 NUT6: library part BOSSARD_BN628-1241443_v, "Nut", Manufacturer=BOSSARD, Manufacturer Part Number="BN628 Art.1241443", Author="CERN DEM JMW", Component Type=Mechanical, ComponentHeight=2.4mm, CreateDate=04/12/2015, HelpURL=\\cern.ch\dfs\Applications\Altium\Datasheets\BOSSARD_BN628-1241443.pdf, LatestRevisionDate=04/12/2015, Mounted=Yes, PackageDescription="M3 Hexagon Nut ~0,8d, ISO 4032, DIN 934, Stainless Steel A2", Part Description="M3 Hexagon Nut ~0,8d, ISO 4032, DIN 934, Stainless Steel A2", Part Number=BOSSARD_BN628-1241443_v, Pin Count=0, PressFit=No, Sense=No, SMD=No, Socket=No, Status=None
R1: library part R4527_0R001_1%_2W_75PPM, "Resistor - 1%", Case=4527, Manufacturer="VISHAY DALE", Manufacturer Part Number=WSR21L000FEA, Power=2W, Tolerance=±1%, Author="CERN DEM JLC", Component Type=Standard, ComponentHeight=2.53mm, CreateDate=22/03/2011, HelpURL=\\cern.ch\dfs\Applications\Altium\Datasheets\R4527_VISHAY_WSR2.pdf, LatestRevisionDate=22/03/2011, Mounted=Yes, Part Description="Surface Mount Power Metal Strip® Resistor", Part Number=R4527_0R001_1%_2W_75PPM, Pin Count=2, PressFit=No, Sense=No, SMD=Yes, Socket=No, Status=None, TC=±75ppm/°C
R2 R4 R5 R6 R12 R14 R15 R16 R17 R18 R32: library part R0603_1K_1%_0.1W_100PPM, "Resistor - 1%", Case=0603, Manufacturer=GENERIC, Manufacturer1 ComponentHeight=0.55mm, Manufacturer1 Example="NIC COMPONENT", Manufacturer1 Part Number=NRC06F1001TRF, Power=0.1W, Tolerance=±1%, Author="CERN DEM JLC", Component Type=Standard, CreateDate=03.12.2007, HelpURL=\\cern.ch\dfs\Applications\Altium\Datasheets\R0603_NIC_NRC.pdf, LatestRevisionDate=13.03.2008, Manufacturer Part Number=R0603_1K_1%_0.1W_100PPM, Mounted=Yes, Part Description="General Purpose Thick Film Chip Resistor", Part Number=R0603_1K_1%_0.1W_100PPM, Pin Count=2, PressFit=No, Sense=No, SMD=Yes, Socket=No, Status=Preferred, TC=±100ppm/°C
R3 R7 R8 R9 R10 R11 R13: library part R0603_10K_1%_0.1W_100PPM, "Resistor - 1%", Case=0603, Manufacturer=GENERIC, Manufacturer1 ComponentHeight=0.55mm, Manufacturer1 Example="NIC COMPONENT", Manufacturer1 Part Number=NRC06F1002TRF, Power=0.1W, Tolerance=±1%, Author="CERN DEM JLC", Component Type=Standard, CreateDate=03.12.2007, HelpURL=\\cern.ch\dfs\Applications\Altium\Datasheets\R0603_NIC_NRC.pdf, LatestRevisionDate=13.03.2008, Manufacturer Part Number=R0603_10K_1%_0.1W_100PPM, Mounted=Yes, Part Description="General Purpose Thick Film Chip Resistor", Part Number=R0603_10K_1%_0.1W_100PPM, Pin Count=2, PressFit=No, Sense=No, SMD=Yes, Socket=No, Status=Preferred, TC=±100ppm/°C
R19: library part R0805_NO-VALUE, "Resistor", Case=0805, Author="CERN DEM JLC", Component Type=Standard, CreateDate=03.12.2007, HelpURL=Undefined, LatestRevisionDate=13.03.2008, Manufacturer=Undefined, Manufacturer1 ComponentHeight=Undefined, Manufacturer1 Example=Undefined, Manufacturer1 Part Number=Undefined, Manufacturer Part Number=R0805_NO-VALUE, Mounted=No, Part Description="Reserved Footprint For a 0805 (2012) Chip Resistor", Part Number=R0805_NO-VALUE, Pin Count=2, PressFit=No, Sense=No, SMD=Yes, Socket=No, Status=None
R37 R38: library part R0603_0R_JUMPER, "Resistor", Case=0603, Manufacturer=GENERIC, Manufacturer1 ComponentHeight=0.55mm, Manufacturer1 Example="NIC COMPONENT", Manufacturer1 Part Number=NRC06Z0, Author="CERN DEM JLC", Component Type=Standard, CreateDate=03.12.2007, HelpURL=\\cern.ch\dfs\Applications\Altium\Datasheets\R0603_NIC_NRC.pdf, LatestRevisionDate=13.03.2008, Manufacturer Part Number=R0603_0R_JUMPER, Mounted=Yes, Part Description="1A (0.05R Max DC Resistance) Zero Ohm Jumper", Part Number=R0603_0R_JUMPER, Pin Count=2, PressFit=No, Sense=No, SMD=Yes, Socket=No, Status=Preferred
SCREW1 SCREW2 SCREW4: library part BOSSARD_BN5687-3061605_v, "Screw", Manufacturer=BOSSARD, Manufacturer Part Number="BN5687 Art.3061605", Author="CERN DEM JLC", Component Type=Mechanical, ComponentHeight=2.4mm, CreateDate=15/01/2013, HelpURL=\\cern.ch\dfs\Applications\Altium\Datasheets\BOSSARD_BN5687-3061605.pdf, LatestRevisionDate=15/01/2013, Mounted=Yes, PackageDescription="M3 L=6mm Hexalobular Socket Pan Head Screw, Fully Threaded - Stainless Steel A2", Part Description="M3 L=6mm Hexalobular Socket Pan Head Screw, Fully Threaded, Stainless Steel A2", Part Number=BOSSARD_BN5687-3061605_v, Pin Count=0, PressFit=No, Sense=No, SMD=No, Socket=No, Status=None
SCREW5 SCREW6: library part BOSSARD_BN5687-3061609_v, "Screw", Manufacturer=BOSSARD, Manufacturer Part Number="BN5687 Art.3061609", Author="CERN DEM JLC", Component Type=Mechanical, ComponentHeight=14.4mm, CreateDate=22/08/2013, HelpURL=\\cern.ch\dfs\Applications\Altium\Datasheets\BOSSARD_BN5687-3061609.pdf, LatestRevisionDate=22/08/2013, Mounted=Yes, PackageDescription="M3 L=12mm Hexalobular Socket Pan Head Screw, Fully Threaded - Stainless Steel A2", Part Description="M3 L=12mm Hexalobular Socket Pan Head Screw, Fully Threaded, Stainless Steel A2", Part Number=BOSSARD_BN5687-3061609_v, Pin Count=0, PressFit=No, Sense=No, SMD=No, Socket=No, Status=None
SCREW11 SCREW12: "Screw; 3x8; Head: countersunk; Pozidriv; A2 stainless steel", Manufacturer=BOSSARD, Manufacturer Part Number=M3X8/BN3327_h, Part Number=OSSARD_M3X8/BN3327, Author=GK, Component Type=Mechanical, ComponentHeight=5.6mm, CreateDate=15/01/2013, HelpURL=\\cern.ch\dfs\Applications\Altium\Datasheets\BOSSARD_BN5687-3061605.pdf, LatestRevisionDate=15/01/2013, Mounted=Yes, PackageDescription="M3 L=8mm Countersunk Posidriv Screw, Fully Threaded - Stainless Steel A2", Part Description="M3 L=8mm  countersunk; Pozidriv Pan Head Screw, Fully Threaded, Stainless Steel A2", Pin Count=0, PressFit=No, Sense=No, SMD=No, Socket=No, Status=None
Spacer1 Spacer2: "Metric Female Unthreaded Round Brass Spacer/Pillar, Length 4mm, External Dia. 6mm, Internal Dia. 3.2mm", Manufacturer=DREMEC, Manufacturer Part Number=DR316/3.2X4, Part Number=DREMEC_DR316/3.2X4, Author=GK, Component Type=Standard, ComponentHeight=6mm, CreateDate=13.09.2017, HelpURL=\\cern.ch\dfs\Applications\Altium\Datasheets\HARWIN_R6162-02.pdf, LatestRevisionDate=13.09.2017, Mounted=Yes, PackageDescription="Metric Female Unthreaded Round Brass Spacer/Pillar, Length 4mm, External Dia. 6mm, Internal Dia. 3.2mm", Part Description="Metric Female Unthreaded Round Brass Spacer/Pillar, Length 4mm, External Dia. 6mm, Internal Dia. 3.2mm", Pin Count=0, PressFit=Yes, Sense=No, SMD=No, Socket=No, Status=None
ST1 ST4 ST5: "M3x28 standoff", Manufacturer=Ettinger, Manufacturer Part Number=05.13.281, Part Number=Ettinger_05.13.281, Author=GK, Component Type=Mechanical, ComponentHeight=28, CreateDate=25.02.2019, HelpURL=\\cern.ch\dfs\Applications\Altium\Datasheets\BOSSARD_BN5687-3061597.pdf, LatestRevisionDate=25.02.2019, Mounted=Yes, PackageDescription="M3 L=28mm   Fully Threaded - Stainless Steel spacer", Part Description="M3x28 male - female Hex Spacer made of free-machining brass with nickel plated finish", Pin Count=0, PressFit=No, Sense=No, SMD=No, Socket=No, Status=None
ST2: library part SCHROFF_PANEL_3U_8HP_CPCIS_PSU, "Schroff 8HP 4U EUROCARD Panel with ejector", Manufacturer=Schroff, Manufacturer Part Number=20848589, Manufacturer Part Number 2=20848589
NT1 NT2 NT3 NT4: Author="CERN DEM JLC", Component Type="Net Tie", ComponentHeight=0mm, CreateDate=22.03.2011, Family="Net Tie", HelpURL=Undefined, LatestRevisionDate=22.03.2011, Mounted=No, PackageDescription="2 Plated Through Hole For Coaxial Cable Link: Hole Dia.=1.4mm Pad Dia.=2.5mm", Part Description="Net Tie (2 Nets)", Part Number="Net Tie", Pin Count=2, Sense=No, SMD=No, Socket=No, Status=None

## Via types
v1: diameter 0.65, hole 0.3, Top Layer to Bottom Layer, 39 vias
v2: diameter 1.27, hole 0.711, Top Layer to Bottom Layer, tented both sides, 6 vias
v3: diameter 0.65, hole 0.3, Top Layer to Bottom Layer, tented both sides, 1 vias

## Nets (pads, with @x,y where several pads share a name; then routed paths per layer and width w, separated by ;. In a path a pad name is that pad's centre, name@x,y a point inside that pad or via, vN(x,y) a via of type N, cw(c..) or ccw(c..) an arc to the next point about the centre after c; other vN are vias at no path point)
0.825V: IC2.9 R10.2 R11.1 | length 27.5
  Top Layer w0.127: IC2.9 27.991,97.061 ; R11.1 30.423,94.145 29.994,94.574 29.994,96.707 29.565,97.136 28.065,97.136 27.991,97.061 ; R10.2 29.905,92.684 28.77,91.55 28.77,90.131 28.37,89.73 27.612,89.73 27.356,89.986 27.356,91.405 27.1,91.661 26.342,91.661 26.086,91.405 26.086,89.986 25.83,89.73 25.072,89.73 24.96,89.842 24.96,94.261 25.941,95.242 25.941,96.661 26.342,97.061 27.991,97.061
0.4125V: IC2.11 R11.2 R13.1 | length 9.3
  Top Layer w0.127: IC2.11 25.451,96.571 26.27,97.39 29.671,97.39 30.675,96.386 31.013,96.386 ; R11.2 31.039,96.386 32.506,96.386 R13.1
1.65V: IC2.5 R8.2 R9.1 | length 3.6
  Top Layer w0.127: R8.2 26.136,87.35 26.721,87.934 IC2.5
1.2375V: IC2.7 R9.2 R10.1 | length 4.4
  Top Layer w0.127: R9.2 28.391,89.21 28.391,89.351 29.261,90.221 IC2.7 29.291,90.666 30.513,90.666 30.546,90.698 30.728,90.698 R10.1
+12V_Sense: J4.2 NT3.1 | length 136.2
  Top Layer w0.2: J4.2 88.78,88.817 89.637,87.96 141.762,87.96 144.551,85.171 144.551,23.927 145.593,22.885 151.525,22.885 152.617,21.793 v1(156.195,21.793)
  Bottom Layer w0.2: v1(156.195,21.793) 158.305,23.903 NT3.1@158.305,24.793
GND: B5.1 B6.1 C1.1 C2.1 C3.1 IC1.2 IC2.12 IC3.2 IC3.3 IC3.6 IC3.7 J1.1 J1.2 J4.3 J5.1 J5.2 J6.1 J6.3 J7.1 J7.2 J8.1 J8.2 J9.1 J9.2 J10.1 J10.2 LD6.1 MP2.1 NT4.2 R13.2 R19.2 | length 60.8
  Top Layer w0.127: v1(1.107,64.861) 1.107,69.993 1.884,70.771 v1(1.884,81.725) ; v1(13.879,87.651) 14.519,87.651 16.999,85.171 v1(17.963,85.171) ; v1(22.499,88.994) 23.165,88.994 C3.1 ; v1(24.173,94.743) 24.181,94.751 IC2.12 ; R13.2 33.203,94.14 33.203,94.488 v1(33.807,94.488) ; IC3.2 v1(37.338,93.679) IC3.7 ; IC3.3 v1(38.608,93.359) IC3.6 ; v1(41.58,93.642) 41.58,94.487 C2.1 ; v1(45.517,93.802) 45.517,94.532 C1.1 ; IC1.2 48.692,91.385 48.692,92.38 v1@48.717,92.405
  Bottom Layer w0.127: LD6.1 v1(1.107,64.861) ; v1(1.884,81.725) 1.954,81.655 2.288,81.655 4.113,79.83 11.542,79.83 13.8,82.088 13.8,87.558 13.838,87.596 13.838,87.61 v1(13.879,87.651)
  other v1: 136.769,6.309 103.089,6.411 54.27,6.792 24.921,6.898 143.413,23.896 143.408,84.201 51.502,88.123 87.087,88.199 100.879,89.367 111.903,90.129 138.903,90.307 86.503,91.933 54.753,92.06 48.692,92.405 138.801,94.269 107.788,94.676
GNDE: FL1.PE J2.2 R19.1 R37.1 R38.1 | length 98.9
  Top Layer w0.127: R38.1 10.625,7.518 v1(11.735,7.518) ; R37.1 11.118,93.429 v1(12.151,93.429)
  Bottom Layer w1: FL1.PE 11.149,33.198 11.735,32.612 ; v1(11.735,7.518) 11.735,32.612 ; v1(12.151,93.429) 15.5,90.08 R19.1 15.5,77.825 13.6,75.925 J2.2 13.6,64.327 15.392,62.535 15.392,55.218 11.735,51.561 11.735,32.612
i_adc: C2.2 IC2.4 IC2.6 IC2.8 IC2.10 R3.1 | length 34.4
  Top Layer w0.127: IC2.4 25.451,92.959 26.279,93.787 26.721,93.787 ; IC2.10 26.721,93.787 ; IC2.6 27.991,92.05 26.721,93.32 26.721,93.787 ; IC2.8 29.261,94.102 28.946,93.787 ; 35.039,96.685 35.458,97.104 41.08,97.104 42.634,95.55 R3.1 ; 35.052,96.672 34.773,96.393 34.773,94.132 34.442,93.802 32.614,93.802 32.136,93.325 30.536,93.325 30.455,93.243 29.49,93.243 28.946,93.787 ; 26.721,93.787 28.946,93.787
Imeas+: IC1.3 NT1.1 | length 135.4
  Top Layer w0.2: IC1.3@49.53,91.338 49.53,92.773 49.039,93.264 49.039,94.552 49.558,95.072 105.745,95.072 107.6,93.218 139.776,93.218 146.05,86.944 146.05,61.179 146.167,61.062 151.316,61.062 151.508,61.253 151.521,61.253
Imeas-: IC1.4 NT2.1 | length 135
  Top Layer w0.2: IC1.4 49.566,94.158 49.766,94.358 52.856,94.358 53.065,94.567 83.447,94.567 83.625,94.745 105.61,94.745 107.899,92.456 140.03,92.456 145.644,86.843 145.644,58.09 146.75,56.983 151.562,56.983
LED_25%: LD5.1 R12.2 | length 40
  Top Layer w0.127: v1(-0.084,70.251) -0.599,70.766 -0.599,75.907 -0.277,76.229 0.189,76.229 0.592,76.632 0.592,80.252 -0.522,81.366 -0.522,81.725 -1.266,82.469 -1.266,89.154 0.766,91.186 14.999,91.186 15.502,91.689 15.552,91.689 15.939,92.076 R12.2
  Bottom Layer w0.127: LD5.1 v1(-0.084,70.251)
LED_50%: LD3.1 R32.2 | length 34.1
  Top Layer w0.127: v1(-0.004,76.765) -0.004,80.15 0.076,80.23 0.076,80.409 -1.524,82.009 -1.524,89.256 0.872,91.651 13.813,91.651 15.477,93.315 15.527,93.315 15.913,93.701 R32.2
  Bottom Layer w0.127: LD3.1@-0.938,75.693 LD3.1 -0.991,75.69 -0.004,76.677 v1(-0.004,76.765)
LED_75%: LD4.1 R17.2 | length 27.7
  Top Layer w0.127: v1(0.22,81.353) 0.22,82.578 -0.758,83.556 -0.758,87.596 -0.297,88.057 -0.297,89.405 0.747,90.449 13.157,90.449 14.783,88.824 R17.2
  Bottom Layer w0.127: LD4.1@-0.807,81.214 LD4.1 -0.186,81.03 0.137,81.353 v1(0.22,81.353)
LED_100%: LD2.1 R14.2 | length 29.7
  Top Layer w0.127: v1(-0.329,82.262) -1.012,82.944 -1.012,87.701 -0.551,88.162 -0.551,89.51 0.744,90.805 12.776,90.805 12.827,90.856 13.64,90.856 13.995,90.5 R14.2
  Bottom Layer w0.127: LD2.1@-0.807,86.236 LD2.1 -0.991,86.37 -0.512,85.891 -0.442,85.891 -0.25,85.699 -0.25,82.341 v1(-0.329,82.262)
NetFL1_N: FL1.N J2.3 | length 52.1
  Top Layer w2.54: 14.103,61.946 14.496,61.553
  Top Layer w3: FL1.N 7.623,40.818 14.516,47.711 14.516,61.553 ; 10.483,83.586 10.483,81.186 7,77.704 7,69.374 14.266,62.109
NetFL1_N': FL1.N' J3.1 | length 14.8
  Top Layer w3: FL1.N' 11.202,23.038 16.627,28.463 J3.1
NetFL1_P: FL1.P J2.1 | length 12.3
  Top Layer w3: FL1.P 9.516,52.329 J2.1@9.516,59.08
NetFL1_P': FL1.P' J3.3 | length 15
  Top Layer w3: FL1.P' 13.513,15.418 18.5,20.405 J3.3@18.5,20.427
NetIC1_1: IC1.1 R3.2 | length 4.8
  Top Layer w0.2: R3.2 47.219,93.142 47.6,92.761 47.6,91.516 IC1.1@47.549,91.465
NetIC2_1: IC2.1 R17.1 | length 4.8
  Top Layer w0.127: R17.1 19.202,88.824 21.074,90.696 IC2.1
NetIC2_2: IC2.2 R14.1 | length 7.2
  Top Layer w0.127: R14.1 18.982,90.5 20.562,92.08 22.525,92.08 22.911,91.694 IC2.2
NetIC2_13: IC2.13 R12.1 | length 8.2
  Top Layer w0.127: R12.1 20.248,92.126 20.807,92.685 21.59,92.685 22.149,93.243 22.149,94.859 22.911,95.621 IC2.13
NetIC2_14: IC2.14 R32.1 | length 6
  Top Layer w0.127: R32.1 20.891,93.751 21.641,94.501 IC2.14
NetJ6_4: J6.4 R4.1 | length 8.7
  Top Layer w0.127: R4.1 102.008,93.739 103.358,92.388 103.358,90.819 104.337,89.84 J6.4@104.369,89.84
NetLD1_1: LD1.1 R2.2 | length 130.7
  Top Layer w0.127: v1(-0.084,60.736) -0.084,69.522 0.846,70.451 0.846,82.312 -0.504,83.661 -0.504,87.304 1.946,89.754 13.134,89.754 16.556,86.332 16.996,86.332 17.388,85.94 27.165,85.94 29.032,87.808 48.071,87.808 53.659,93.396 95.136,93.396 R2.2
  Bottom Layer w0.127: LD1.1 -0.905,59.385 -0.084,60.206 v1(-0.084,60.736)
NetLD6_2: LD6.2 R18.1 | length 153.7
  Top Layer w0.127: v1(0.533,62.861) 0.533,69.779 1.354,70.6 1.354,82.163 -0.25,83.767 -0.25,87.199 2.051,89.5 13.029,89.5 16.451,86.078 16.81,86.078 17.202,85.686 27.27,85.686 29.137,87.554 49.149,87.554 54.737,93.142 89.51,93.142 89.637,93.015 ; 89.638,93.015 89.789,92.864 89.789,89.51 90.653,88.646 107.927,88.646 110.721,91.44 R18.1
  Bottom Layer w0.127: LD6.2 v1(0.533,62.861)
NetR7_2: R7.2 R8.1 | length 1.6
  Top Layer w0.127: R7.2 22.974,87.3 R8.1
NetR15_1: R15.1 R16.2 | length 1.7
  Top Layer w0.127: R16.2 122.644,91.44 R15.1
NetR16_1: R16.1 R18.2 | length 1.8
  Top Layer w0.127: R18.2 R16.1
NetR37_2: R37.2 ST2.1 | length 6.3
  Top Layer w0.4: ST2.1 4.374,93.679 9.218,93.679 9.468,93.429 R37.2
NetR38_2: R38.2 ST2.0 | length 6.2
  Top Layer w0.2: ST2.0 7.008,5.501 8.605,7.098 8.655,7.098 9.005,7.448 R38.2
P2V5REF: IC3.1 IC3.8 R5.1 R6.1 R7.1 | length 25.7
  Top Layer w0.127: R7.1 21.349,86.401 21.514,86.236 24.101,86.236 24.143,86.194 26.276,86.194 27.88,87.797 28.198,87.797 28.946,88.545 28.946,88.724 30.527,90.305 R5.1 R6.1 32.918,92.158 32.918,93.142 33.118,93.342 33.156,93.379 33.261,93.379 33.913,93.339 ccw(c33.96,94.107) 33.976,93.338 35.888,93.379 36.068,93.379 ; IC3.1 36.068,93.379 ; IC3.8 36.068,93.379
P5V0SB: C1.2 C3.2 IC1.5 IC2.3 J6.2 LD1.2 LD2.2 LD3.2 LD4.2 LD5.2 R4.2 R5.2 R6.2 | length 160.4
  Top Layer w0.127: v1(0.35,88.921) 1.471,90.043 13.204,90.043 14.678,88.57 14.758,88.57 16.742,86.586 19.161,86.586 20.711,88.136 23.696,88.136 23.876,88.316 23.876,88.69 C3.2 24.181,88.994 IC2.3 ; R5.2 R6.2 ; 43.54,92.353 43.559,92.372 43.559,92.399 43.485,92.474 43.485,93.612 44.986,95.114 46.35,95.114 46.424,95.039 C1.2 47.034,93.929 IC1.5@47.676,93.929
  Top Layer w0.5: C3.2 24.13,88.929 25.367,88.929 v1(25.375,88.921) ; v1(30.175,88.936) 30.203,88.964 34.303,88.964 ; R5.2 34.303,88.964 ; 43.54,92.353 43.586,92.306 43.586,91.897 45.06,90.424 45.06,89.687 45.06,89.433 49.074,89.433 53.477,93.836 83.391,93.836 83.823,94.268 96.468,94.268 96.761,93.975 96.761,92.875 97.354,92.282 98.078,92.282 R4.2 100.038,92.139 J6.2 ; 45.06,89.535 44.094,88.57 34.696,88.57 34.303,88.964
  Bottom Layer w0.127: LD1.2 -0.991,57.521 -1.531,58.061 -1.531,59.95 -1.442,60.039 -1.442,62.292 -1.531,62.382 -1.531,67.66 -0.991,68.201 LD5.2 -0.991,68.301 -1.531,68.841 -1.531,73.266 -1.442,73.355 -1.276,73.355 LD3.2 -0.991,73.69 -1.531,74.231 -1.531,76.543 -1.277,76.797 -1.277,78.744 LD4.2 -0.991,79.711 -1.531,80.251 -1.531,81.882 -1.322,82.091 -1.322,83.065 -1.277,83.11 -1.277,84.134 LD2.2 -0.991,84.47 -1.71,85.189 -1.71,86.586 -1.531,86.765 -1.531,87.446 -1.457,87.521 -1.051,87.521 v1(0.35,88.921)
  Bottom Layer w0.5: v1(25.375,88.921) 30.16,88.921 v1(30.175,88.936)
P12V0: J1.3 J1.4 J5.3 J5.4 J7.3 J7.4 J8.3 J8.4 J9.3 J9.4 J10.3 J10.4 NT2.2 NT3.2 R1.2 R15.2 | length 60.7
  Top Layer w0.254: R15.2 127.856,91.491 128.059,91.694 139.929,91.694 140.373,91.249 140.373,91.046 145.161,86.258 145.161,55.956 146.61,54.507 R1.2
P12V0_SMPS: MP1.1 NT1.2 R1.1 | length 58.4
  Top Layer w0.254: MP1.1@148.652,67.752 150.216,67.752 150.635,67.752 151.192,67.752 152.692,67.752 153.01,67.752 153.732,67.752 153.732,67.757 152.829,68.661
  Top Layer w0.4: v2(147.98,63.729) 151.521,63.729 R1.1 ; v2(148.057,65.176) 150.231,65.176 R1.1@151.192,64.215 ; R1.1@151.6,63.729 152.117,63.729 R1.1@152.472,63.374 ; 152.692,68.661 152.692,72.832 ; 153.01,68.661 MP1.1@153.01,72.832 ; MP1.1@153.732,72.832 152.829,72.832 MP1.1@151.6,72.832 ; R1.1@153.864,61.982 R1.1@152.472,63.374 ; v2(155.092,63.957) R1.1@154.15,63.957 ; v2(155.169,65.354) 154.15,65.354 R1.1@153.01,64.214 ; R1.1@151.192,64.215 R1.1 ; R1.1@151.192,64.215 151.192,67.195 150.635,67.752 151.192,68.31 MP1.1@151.192,72.832 ; MP1.1@151.192,72.832 MP1.1@151.192,73.24 ; MP1.1@151.192,72.832 MP1.1@151.192,73.24 ; MP1.1@151.192,72.832 MP1.1@151.192,73.24 ; MP1.1@151.192,72.832 MP1.1@151.192,73.24 ; MP1.1@151.192,72.832 MP1.1@151.192,73.24 ; MP1.1@151.192,72.832 MP1.1@151.6,72.832 ; MP1.1@151.192,73.24 MP1.1@151.6,72.832 ; R1.1 151.75,63.957 R1.1@153.01,63.957 ; R1.1 R1.1@152.034,63.374 ; R1.1@152.034,63.374 R1.1@152.472,63.374 ; R1.1@152.034,63.374 153.38,62.027 153.864,62.027 153.864,63.671 R1.1@154.15,63.957 ; R1.1@152.472,63.374 153.01,63.374 R1.1@153.01,63.957 ; R1.1@153.01,63.957 R1.1@153.01,64.214 ; R1.1@153.01,63.957 R1.1@154.15,63.957 ; R1.1@153.01,64.214 MP1.1@153.01,67.752 ; MP1.1@153.01,67.752 MP1.1@153.732,67.752 ; MP1.1@153.01,67.752 MP1.1@153.732,67.752 ; MP1.1@153.01,67.752 MP1.1@153.732,67.752
  other v2: 147.93,62.306 155.169,62.433
RTN_Sense: J4.1 NT4.1 | length 146.7
  Top Layer w0.2: J4.1@88.519,91.973 88.519,91.865 87.681,91.027 87.681,89.002 89.095,87.588 141.672,87.588 144.224,85.036 144.224,23.441 145.263,22.403 151.308,22.403 155.27,18.44 164.973,18.44 165.557,19.025
SMPS_PG: J4.4 R2.1 | length 5.7
  Top Layer w0.127: J4.4 90.786,90.126 90.856,90.195 90.925,90.126 93.098,90.126 94.818,91.846 95.11,91.846 R2.1 R2.1@94.776,91.436
pads on no net: B1.1 B2.1 B4.1 IC3.4 IC3.5 J1.5 J2.4 J2.5 J3.2 J5.5 J7.5 J8.5 J9.5 J10.5 LD1.3 LD2.3 LD3.3 LD4.3 LD5.3 LD6.3
copper on no net:
  other v3: 149.53,4.851

## Polygon pours and split planes (outlines as drawn)
GND on Bottom Layer "tgr" (solid, remove dead copper, pour order 3): 16.5,4.801 174.999,4.801 174.999,95.174 16.563,95.174
P12V0 on Top Layer "P12V0_L01_P001" (solid, pour order 1): 156.423,87.3 146.936,77.813 146.936,31.488 154.49,31.488 155.419,30.559 155.431,22.597 159.258,18.771 174.714,18.771 174.714,87.3
GND on Top Layer "NONET_L06_P-001" (solid, remove dead copper, pour order 4): 16.5,95.199 146.247,95.199 146.247,4.801 16.5,4.801

## Keep-outs
Keep-Out Layer:
  lines w0.1: 26.766,16.106 cw(c24.901,16.05) 26.765,16.124 ; 26.766,80.906 cw(c24.901,80.85) 26.765,80.924 ; 142.566,16.106 cw(c140.701,16.05) 142.565,16.124